# EAGLE board Main_PCB_Layout (EAGLE 9.7.0)
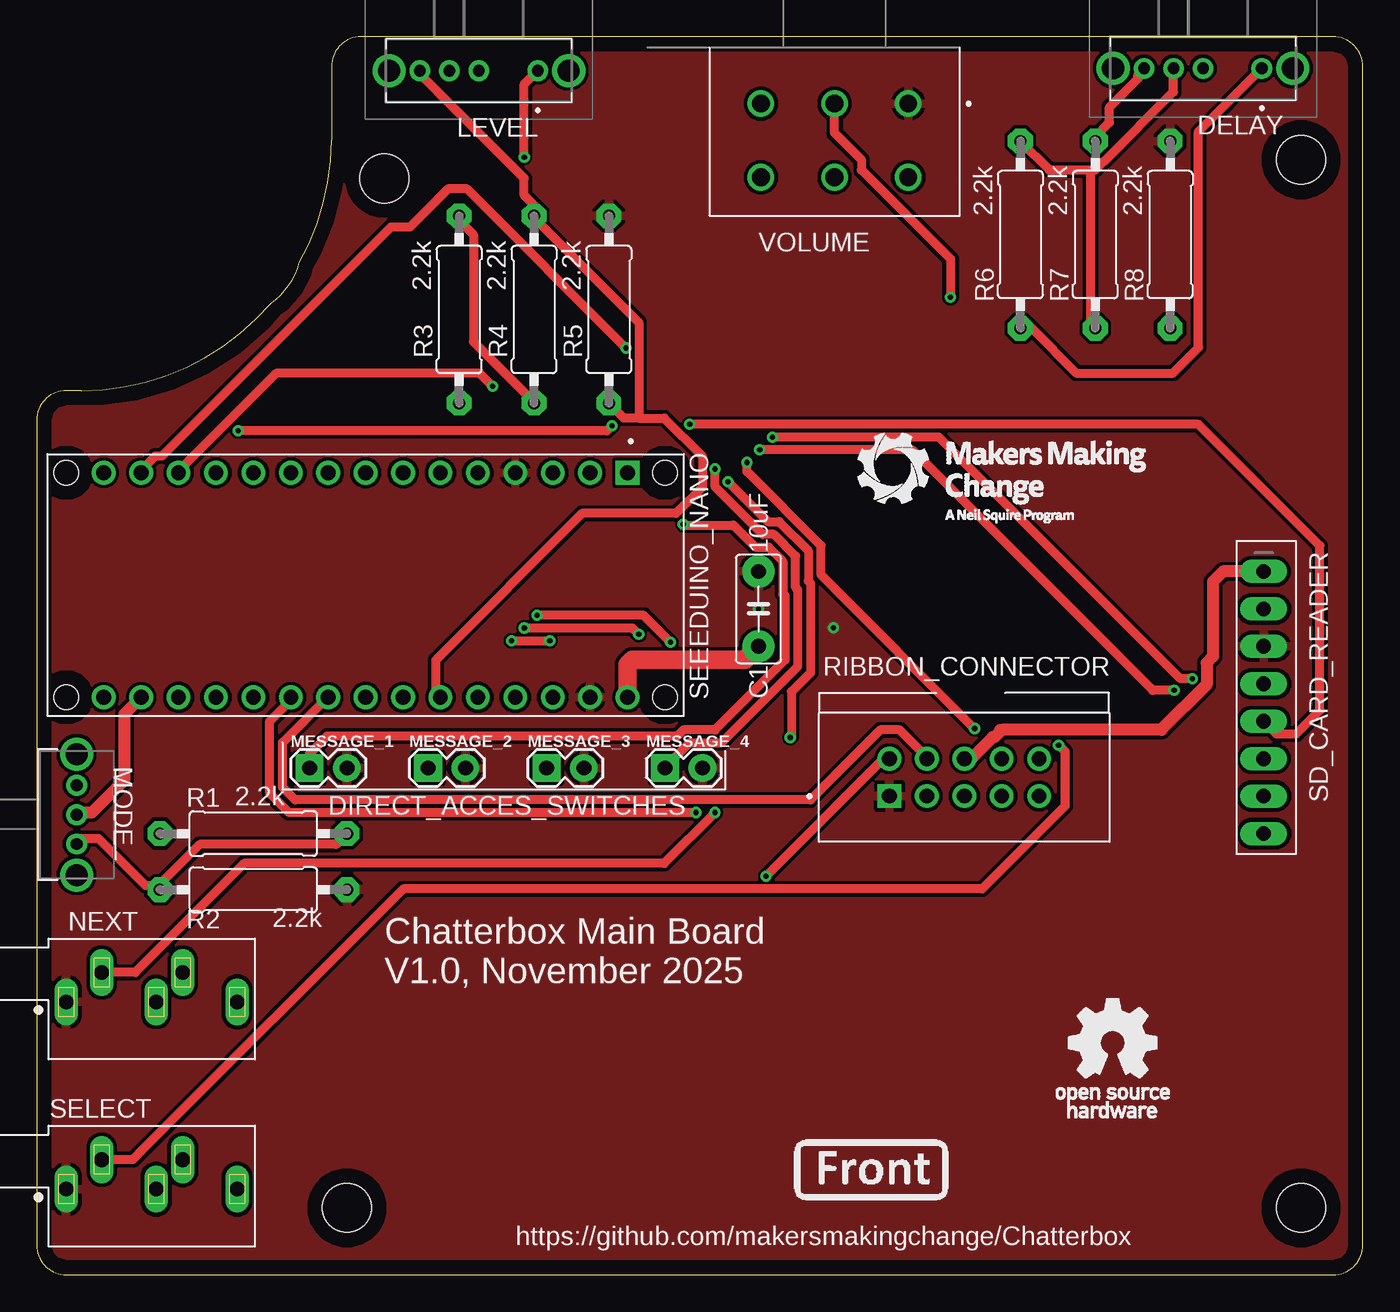
[diagram p0: board, top side]
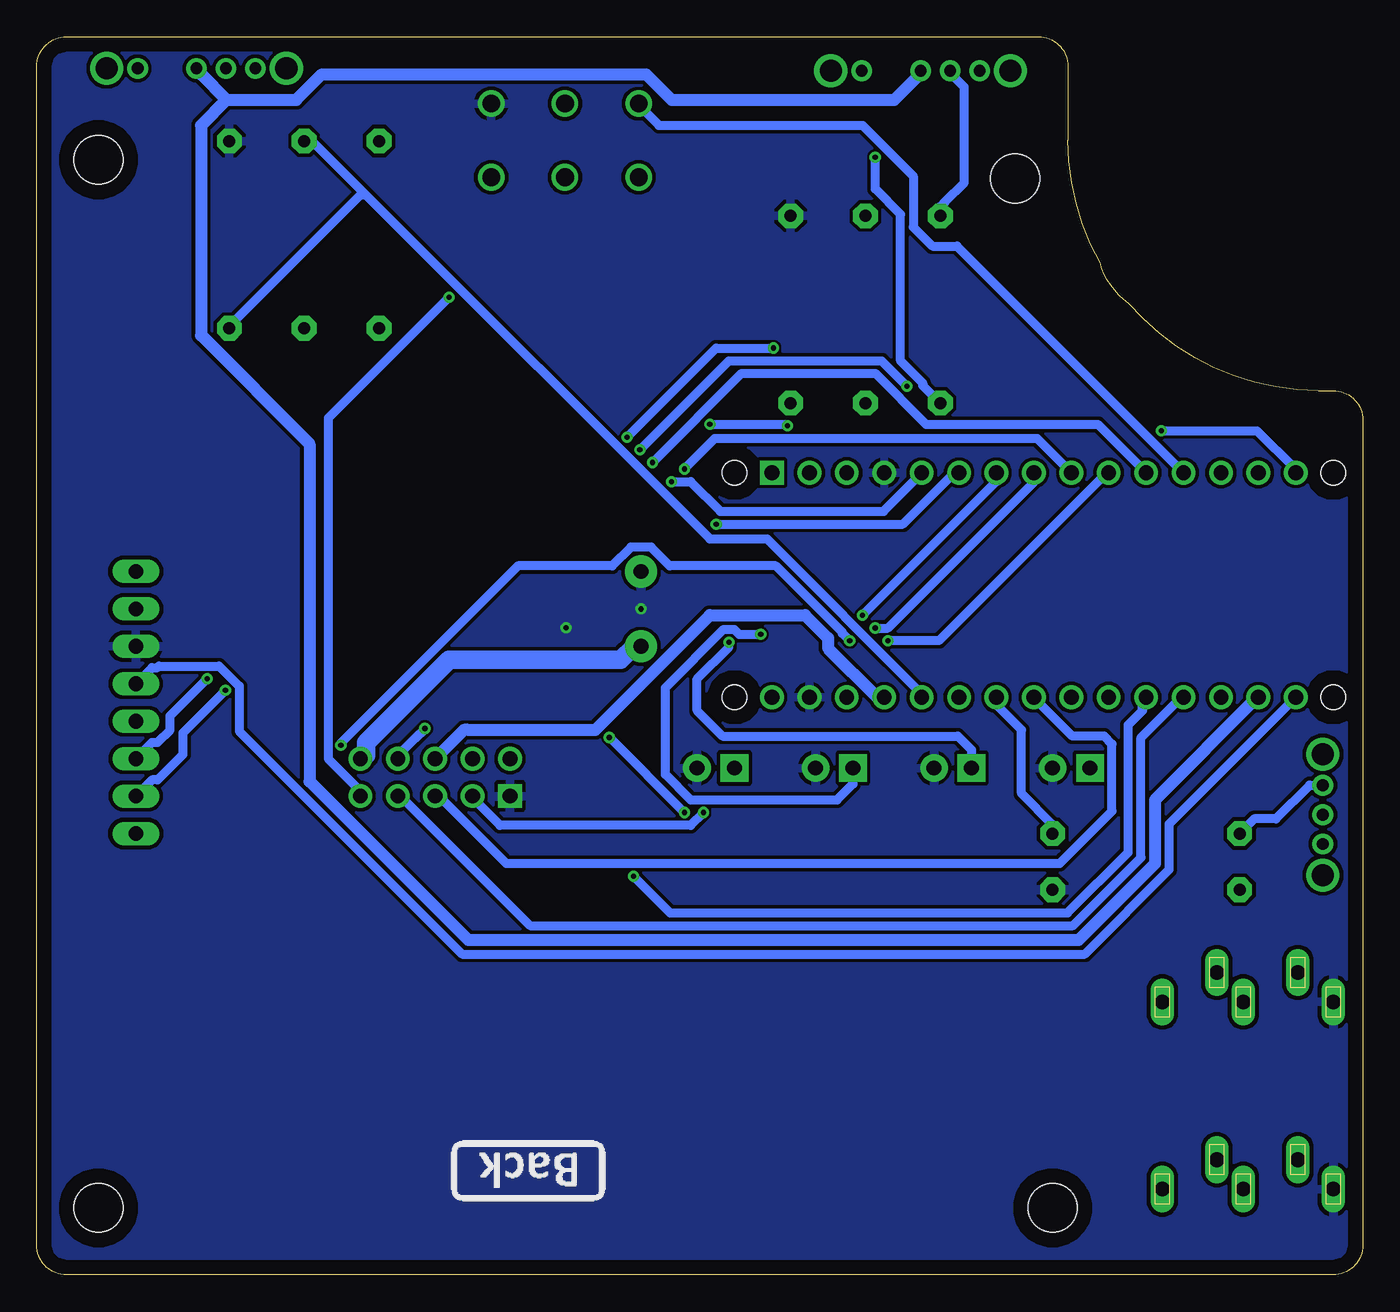
[diagram p1: board, bottom side, seen from below]

Size 90 x 84 mm. Coordinates in mm from the lower left corner, seen from the top.
Outline: 3,60 2,60 arc90 0,58 0,2 arc90 2,0 88,0 arc90 90,2 90,82 arc90 88,84 22,84 arc90 20,82 20,77 arc-29 17.82,68.67 arc-39 15.9,65.92 arc-49 3,60
Copper layers (1*16): Top / Bottom
Stack-up Default Layer Stack: Top SilkScreen Epoxy Ink / Top SolderMask SR:Green 0.0254mm Dk 4.3 / Top Surface Finish Lead-Free 0.02mm / Top CuFoil:007 0.035mm / Dielectric-1 User Defined 1.5mm / Bottom CuFoil:007 0.035mm / Bottom Surface Finish Lead-Free 0.02mm / Bottom SolderMask SR:Green 0.0254mm Dk 4.3 / Bottom SilkScreen Epoxy Ink
Design rules: minimum copper width 16mil, minimum drill size 0.35mm, copper clearance all to all 6mil, copper clearance wire_polygon to wire_polygon 10mil, copper clearance wire_polygon to pad_smd 10mil, copper clearance wire_polygon to via 6mil, copper clearance pad_smd to pad_smd 6mil, copper clearance pad_smd to via 6mil, copper clearance via to via 6mil, copper clearance smd to pad (same net) 6mil, copper clearance smd to via (same net) 6mil, copper clearance smd to smd (same net) 6mil, dimension clearance 40mil, via restrict clearance 0mil, restrict clearance 0mil, drill distance 6mil, keepout clearance 0mil

## Footprints (pad centres in the part's own frame; a part is rotated, then mirrored left to right if it is on the bottom)
CAP-050-030X075 = drill 1.016 pad 2.184: 1 -2.54,0; 2 2.54,0
OS103011MA7QP1 = drill 0.8 pad 1.3: 1 0,0; 2 4,0; 3 6,0; 4 8,0 | drill 1.5 pad 2.25: MH1 -2.1,0; MH2 10.1,0
HEADER_MALE-1X02 = drill 1.016 pad 1.88 square: 1 0,0 | drill 1.016 pad 1.88: 2 2.54,0
SWITCH_SPDT_11MA1QS1 = drill 0.813 pad 1.321: 1 -2.007,0; 2 0,0; 3 1.981,0 | drill 1.499 pad 2.007: 4 -4.115,0; 5 4.089,0
CUI_SJ1-3535NG = drill 1 long: 1 0,0; 2 2.4,2; 3 7.9,2; 4 11.6,0; 5 6.1,0
0309/12 = drill 0.813 pad 1.676 octagon: 1 -6.35,0; 2 6.35,0
AMPHENOL_86130101014345E1LF = drill 1 pad 1.508 square: 01 -5.08,-1.27 | drill 1 pad 1.508: 02 -5.08,1.27; 03 -2.54,-1.27; 04 -2.54,1.27; 05 0,-1.27; 06 0,1.27; 07 2.54,-1.27; 08 2.54,1.27; 09 5.08,-1.27; 10 5.08,1.27
1X08_OVAL = drill 1 long: 1 -8.89,0; 2 -6.35,0; 3 -3.81,0; 4 -1.27,0; 5 1.27,0; 6 3.81,0; 7 6.35,0; 8 8.89,0
MODULE_A000005 = drill 1 square: 1 -7.62,17.78 | drill 1: 2 -7.62,15.24; 3 -7.62,12.7; 4 -7.62,10.16; 5 -7.62,7.62; 6 -7.62,5.08; 7 -7.62,2.54; 8 -7.62,0; 9 -7.62,-2.54; 10 -7.62,-5.08; 11 -7.62,-7.62; 12 -7.62,-10.16; 13 -7.62,-12.7; 14 -7.62,-15.24; 15 -7.62,-17.78; 16 7.62,-17.78; 17 7.62,-15.24; 18 7.62,-12.7; 19 7.62,-10.16; 20 7.62,-7.62; 21 7.62,-5.08; 22 7.62,-2.54; 23 7.62,0; 24 7.62,2.54; 25 7.62,5.08; 26 7.62,7.62; 27 7.62,10.16; 28 7.62,12.7; 29 7.62,15.24; 30 7.62,17.78 | hole 1.651: -7.62,-20.32; 7.62,-20.32; -7.62,20.32; 7.62,20.32
STAND-OFF = hole 3.302: 0,0
POT_PTN16-A10125K1A2 = drill 1.2: R1_1 0,0; R1_2 5,0; R1_3 10,0; R2_1 0,5; R2_2 5,5; R2_3 10,5

## Placement (x,y rotation side)
C1  CAPACITOR-US-050-030X075  [CAP-050-030X075]  48.99,45.18 90 top
DELAY  OS103011MA7QP1  [OS103011MA7QP1]  83.16,81.86 180 top
LEVEL  OS103011MA7QP1  [OS103011MA7QP1]  34.01,81.7 180 top
MESSAGE_1  HEADER_MALE-1X02  [HEADER_MALE-1X02]  18.51,34.38 0 top
MESSAGE_2  HEADER_MALE-1X02  [HEADER_MALE-1X02]  26.55,34.38 0 top
MESSAGE_3  HEADER_MALE-1X02  [HEADER_MALE-1X02]  34.6,34.38 0 top
MESSAGE_4  HEADER_MALE-1X02  [HEADER_MALE-1X02]  42.64,34.38 0 top
MODE  SWITCH-SPDT-OS102011  [SWITCH_SPDT_11MA1QS1]  2.7,31.21 270 top
NEXT  CUI_SJ1-3535NGSJ1-3535NG  [CUI_SJ1-3535NG]  2,18.51 0 top
R1  2.2K  [0309/12]  14.7,29.94 0 top
R2  2.2K  [0309/12]  14.7,26.13 0 top
R3  2.2K  [0309/12]  28.67,65.5 90 top
R4  2.2K  [0309/12]  33.75,65.5 90 top
R5  2.2K  [0309/12]  38.83,65.5 90 top
R6  2.2K  [0309/12]  66.77,70.58 90 top
R7  2.2K  [0309/12]  71.85,70.58 90 top
R8  2.2K  [0309/12]  76.93,70.58 90 top
RIBBON_CONNECTOR  86130101014345E1LF  [AMPHENOL_86130101014345E1LF]  62.96,33.75 0 top
SD_CARD_READER  [1X08_OVAL]  83.28,38.83 270 top
SEEEDUINO_NANO  A000005  [MODULE_A000005]  22.32,46.8 270 top
SELECT  CUI_SJ1-3535NGSJ1-3535NG  [CUI_SJ1-3535NG]  2,5.81 0 top
U$1  MMC_LOGO-SM  [MMC_SMALL_LOGO]  66.77,54.07 0 top
U$2  OSHW_LOGO-SM  [OSHW_SMALL_LOGO]  73.12,14.7 0 top
U$3  MMC_LABEL-FRONT  [LABEL-FRONT]  56.61,7.08 0 top
U$4  STAND-OFF-  [STAND-OFF]  85.82,75.66 0 top
U$5  MMC_LABEL-BACK  [LABEL-BACK]  56.61,7.08 180 bottom
U$10  STAND-OFF-  [STAND-OFF]  23.59,74.39 0 top
U$11  STAND-OFF-  [STAND-OFF]  85.82,4.54 0 top
U$12  STAND-OFF-  [STAND-OFF]  21.05,4.54 0 top
VOLUME  PTN16-A10125K1A2  [POT_PTN16-A10125K1A2]  59.15,79.47 180 top

## Library data of the parts
C1 MESSAGE_1-MESSAGE_4 = MMC_Electronics_Library
DELAY LEVEL = OS103011MA7QP1; ARROW_PART_NUMBER: OS103011MA7QP1; ARROW_PRICE-STOCK: https://www.arrow.com/en/products/os103011ma7qp1/ck?region=europe; DESCRIPTION: Switch Slide ON ON ON SP3T Side Slide 0.1A 12VDC 10000Cycles PC Pins Bracket Mount/Through Hole Bulk; HEIGHT: 4.7mm; MANUFACTURER_NAME: C & K COMPONENTS; MANUFACTURER_PART_NUMBER: OS103011MA7QP1; MOUSER_PART_NUMBER: 611-OS103011MA7QP1; MOUSER_PRICE-STOCK: https://www.mouser.co.uk/ProductDetail/CK/OS103011MA7QP1?qs=WtljUlYws5SZzmleoPXX2w%3D%3D
MODE NEXT SD_CARD_READER SELECT U$1-U$5 U$10-U$12 = MMC_Eagle
R1-R8 = adafruit
RIBBON_CONNECTOR = 86130101014345E1LF; MANUFACTURER: Amphenol; PARTREV: C; STANDARD: Manufacturer Recommendations
SEEEDUINO_NANO = A000005; MANUFACTURER: Arduino; MAXIMUM_PACKAGE_HEIGHT: N/A; PARTREV: 23/03/2020; STANDARD: Manufacturer Recommendations
VOLUME = PTN16-A10125K1A2; MANUFACTURER: CUI Devices; MAXIMUM_PACKAGE_HEIGHT: 21.5mm; PARTREV: 1.0; STANDARD: Manufacturer Recommendations

## Nets
+3.3V: DELAY.2 LEVEL.2 MODE.2 SEEEDUINO_NANO.17
+5V: RIBBON_CONNECTOR.06 SD_CARD_READER.1 SEEEDUINO_NANO.27
+9V: C1.1 RIBBON_CONNECTOR.10 SEEEDUINO_NANO.30
CLK: SD_CARD_READER.4 SEEEDUINO_NANO.16
CS: SD_CARD_READER.7 SEEEDUINO_NANO.13
DELAY: DELAY.4 R7.2 R8.1 SEEEDUINO_NANO.26
DI: SD_CARD_READER.6 SEEEDUINO_NANO.14
DO: SD_CARD_READER.5 SEEEDUINO_NANO.15
GND1: C1.2 MESSAGE_1.2 MESSAGE_2.2 MESSAGE_3.2 MESSAGE_4.2 NEXT.1 R2.2 R5.2 R8.2 RIBBON_CONNECTOR.01 SD_CARD_READER.3 SEEEDUINO_NANO.4 SEEEDUINO_NANO.29 SELECT.1 VOLUME.R1_1
LED1: RIBBON_CONNECTOR.02 SEEEDUINO_NANO.20
LED2: RIBBON_CONNECTOR.03 SEEEDUINO_NANO.21
LED3: RIBBON_CONNECTOR.04 SEEEDUINO_NANO.22
LED4: RIBBON_CONNECTOR.05 SEEEDUINO_NANO.23
LVL: LEVEL.4 R4.2 R5.1 SEEEDUINO_NANO.25
MIC: RIBBON_CONNECTOR.07 SEEEDUINO_NANO.19
MODE: MODE.3 R1.2 R2.1 SEEEDUINO_NANO.24
MSG1: MESSAGE_1.1 SEEEDUINO_NANO.6
MSG2: MESSAGE_2.1 SEEEDUINO_NANO.7
MSG3: MESSAGE_3.1 SEEEDUINO_NANO.8
MSG4: MESSAGE_4.1 SEEEDUINO_NANO.9
N$22: MODE.1 R1.1
N$24: LEVEL.1 R3.1
N$25: LEVEL.3 R3.2 R4.1
N$27: DELAY.1 R6.1
N$30: DELAY.3 R6.2 R7.1
NEXT: NEXT.2 SEEEDUINO_NANO.5
POT: SEEEDUINO_NANO.12 VOLUME.R1_3
SEL: SEEEDUINO_NANO.10 SELECT.2
SPK_SHT: RIBBON_CONNECTOR.08 SEEEDUINO_NANO.11
VOL: RIBBON_CONNECTOR.09 VOLUME.R1_2

## Tracks (layer width: path | path; a pad name or v marks a point on that pad's centre or on a via)
+3.3V
  Top 0.813: MODE.2 2.86,31.36 3.73,31.36 5.96,33.6 5.96,38.06 SEEEDUINO_NANO.17
  Bottom 0.813: 77.13,79.72 72.38,79.72 70.66,81.45 48.63,81.45 46.91,79.72 31.79,79.72 30.07,81.45 LEVEL.2 | 77.13,79.72 78.86,81.45 DELAY.2 | 77.13,79.72 78.86,78 78.86,63.75 71.48,56.37 71.48,33.48 60.73,22.73 19.27,22.73 14.09,27.91 14.09,32.23 7.14,39.18 SEEEDUINO_NANO.17
+5V
  Top 0.813: 65.5,36.98 76.34,36.98 79.41,40.04 79.41,41.52 79.84,41.96 79.84,47.04 80.53,47.72 SD_CARD_READER.1 | 65.38,36.98 65.5,36.98 | RIBBON_CONNECTOR.06 63.43,35.02 64.89,36.48 65.01,36.48 65.5,36.98
  Bottom 0.813: SEEEDUINO_NANO.27 32.95,39.18 36.29,42.52 36.29,43.2 37.84,44.75 44.31,44.75 52.09,36.98 60.42,36.98 60.73,36.98 61,36.98 RIBBON_CONNECTOR.06
+9V
  Top 1.27: SEEEDUINO_NANO.30 40.1,41.4 40.43,41.73 48.08,41.73 C1.1
  Bottom 1.27: RIBBON_CONNECTOR.10 67.63,35.25 67.63,36.11 62.02,41.73 50.36,41.73 49.5,42.59 48.99,42.59 C1.1
CLK
  Bottom 0.61: SEEEDUINO_NANO.16 13.12,30.59 13.12,27.51 18.87,21.76 61.12,21.76 76.26,36.9 76.26,39.94 77.63,41.31 81.7,41.31 81.8,41.2 82.18,41.2 SD_CARD_READER.4
CS  (via drill 0.35)
  Top 0.61: v30.93,60.29 30.07,61.16 16.25,61.16 9.77,54.68 SEEEDUINO_NANO.13 | v49.07,55.98 59.43,55.98 75.75,39.65 v77.2,39.65
  Bottom 0.61: v30.93,60.29 32.66,62.02 43.02,62.02 v49.07,55.98 | SD_CARD_READER.7 82.18,33.58 81.8,33.58 80.1,35.29 80.1,36.75 v77.2,39.65
DELAY
  Top 0.61: DELAY.4 74.75,81.44 74.75,81.16 72.81,79.23 72.81,78.2 71.85,77.23 R7.2
  Bottom 0.61: 67.63,73.25 71.52,77.13 R7.2 | 67.63,73.25 44.32,49.93 40.43,49.93 29.94,39.44 SEEEDUINO_NANO.26 | 67.63,73.25 68.06,73.25 76.7,64.61 R8.1
DI  (via drill 0.35)
  Top 0.61: v40,62.88 29.2,73.68 27.91,73.68 25.32,71.09 24.02,71.09 8.48,55.54 8.04,55.54 7.18,54.68 SEEEDUINO_NANO.14 | v78.44,40.44 77.63,40.44 61.23,56.84 v49.93,56.84
  Bottom 0.61: v40,62.88 43.88,62.88 v49.93,56.84 | v78.44,40.44 80.96,37.93 80.96,36.96 81.8,36.12 82.18,36.12 SD_CARD_READER.6
DO  (via drill 0.35)
  Top 0.61: v13.66,57.27 38.7,57.27 v39.04,57.61 | v44.32,57.7 78.86,57.7 87.09,49.47 87.09,38.3 85.47,36.68 84.55,36.68 84.16,36.68 SD_CARD_READER.5
  Bottom 0.61: v13.66,57.27 7.18,57.27 4.59,54.68 SEEEDUINO_NANO.15 | v44.32,57.7 39.13,57.7 v39.04,57.61
GND1  (via drill 0.35)
  other vias: 54.07,43.91 48.99,45.18
  pour Top: -1.81,-3.08 -1.81,89.63 88.36,89.63 94.71,83.28 94.71,-1.81 92.17,-4.35 -0.54,-4.35
  pour Bottom: -1.81,88.36 90.9,88.36 92.17,87.09 92.17,0.73 87.09,-4.35 -4.35,-4.35 -5.62,-3.08 -5.62,84.55
LED1  (via drill 0.35)
  Top 0.61: v49.5,27.04 57.04,34.59 57.47,35.02 RIBBON_CONNECTOR.02
  Bottom 0.61: SEEEDUINO_NANO.20 14.95,39.13 14.95,38.27 15.92,37.31 15.92,28.67 20.03,24.55 47.01,24.55 v49.5,27.04
LED2  (via drill 0.35)
  Top 0.61: v44.75,31.36 17.11,31.36 15.82,32.66 15.82,37.56 17.24,38.98 SEEEDUINO_NANO.21
  Bottom 0.61: v44.75,31.36 45.61,30.5 58.57,30.5 60.42,32.35 RIBBON_CONNECTOR.03
LED3
  Top 0.61: RIBBON_CONNECTOR.04 60.42,35.12 58.57,36.98 57.27,36.98 52.52,32.23 17.55,32.23 16.68,33.09 16.68,36.11 19.75,39.18 SEEEDUINO_NANO.22
LED4
  Bottom 0.61: RIBBON_CONNECTOR.05 62.71,32.48 58.13,27.91 20.57,27.91 17.01,31.46 17.01,36.01 17.55,36.54 19.7,36.54 22.32,39.16 SEEEDUINO_NANO.23
LVL
  Top 0.61: 40.86,58.13 42.59,58.13 45.18,55.54 45.18,53.45 43.38,51.66 37.03,51.66 27.07,41.7 27.07,39.51 SEEEDUINO_NANO.25 | 40.86,58.13 40.86,64.61 33.75,71.72 R4.2 33.75,72.59 33.09,73.25 33.09,74.39 26.01,81.47 LEVEL.4 | 40.86,58.13 39.85,58.13 R5.1
MIC
  Bottom 0.61: SEEEDUINO_NANO.19 12.36,39.13 15.06,36.44 15.06,28.31 19.67,23.69 56.51,23.69 65.3,32.48 RIBBON_CONNECTOR.07
MODE
  Top 0.61: MODE.3 3.07,29.6 4.2,29.6 7.37,26.42 8.06,26.42 R2.1 8.35,26.49 11.07,29.2 20.31,29.2 R1.2
  Bottom 0.61: SEEEDUINO_NANO.24 24.89,39.13 24.89,38.7 23.16,36.98 23.16,32.66 21.05,30.55 R1.2
MSG1  (via drill 0.35)
  Top 0.61: v43.88,50.94 43.96,50.86 47.27,50.86 48.77,49.37 49.67,49.37 50.64,48.4 50.64,46.2 50.79,46.04 50.79,41.73 46.04,36.98 43.88,36.98 43.45,36.54 19.7,36.54 18.51,35.35 MESSAGE_1.1
  Bottom 0.61: v43.88,50.94 31.21,50.94 27.73,54.42 SEEEDUINO_NANO.6
MSG2  (via drill 0.35)
  Top 0.61: v43.02,42.92 41.2,44.75 v33.95,44.75
  Bottom 0.61: v43.02,42.92 43.02,42.59 45.18,40.43 45.18,38.27 43.45,36.54 27.48,36.54 26.55,35.62 MESSAGE_2.1 | v33.95,44.75 24.86,53.84 SEEEDUINO_NANO.7
MSG3  (via drill 0.35)
  Top 0.61: v33.09,43.88 40.43,43.88 v40.86,43.45
  Bottom 0.61: v33.09,43.88 32.23,43.88 22.32,53.79 SEEEDUINO_NANO.8 | v40.86,43.45 42.33,43.45 42.66,43.79 43.38,43.79 47.34,39.83 47.34,33.95 45.61,32.23 35.68,32.23 34.6,33.31 MESSAGE_3.1
MSG4  (via drill 0.35)
  Top 0.61: v46.04,54.68 46.04,53.46 49.27,50.23 50.03,50.23 51.51,48.76 51.51,46.63 51.66,46.48 51.66,41.29 46.48,36.11 44.32,36.11 42.64,34.44 MESSAGE_4.1
  Bottom 0.61: v46.04,54.68 43.98,56.75 22.11,56.75 SEEEDUINO_NANO.9
N$22
  Bottom 0.61: MODE.1 3.6,33.22 5.89,30.93 7.36,30.93 R1.1
N$24  (via drill 0.35)
  Top 0.61: v33.09,75.84 33.09,80.79 LEVEL.1
  Bottom 0.61: v33.09,75.84 33.09,73.68 31.36,71.95 31.36,62.02 29.85,60.51 29.85,60.33 R3.1
N$25
  Top 0.61: R4.1 33.52,59.43 29.64,63.32 29.64,70.58 28.67,71.55 R3.2
  Bottom 0.61: LEVEL.3 27.91,81.45 27.04,80.59 27.04,74.11 28.35,72.8 28.67,72.48 R3.2
N$27
  Top 0.61: DELAY.1 78.86,77.56 78.86,62.91 77.13,61.18 70.58,61.18 67.53,64.23 R6.1
N$30
  Top 0.61: 71.52,74.97 69.31,74.97 68.93,74.97 68.73,74.97 R6.2 | 71.52,74.97 71.85,74.97 72.41,75.53 72.43,75.53 77.16,80.27 DELAY.3 | 71.52,74.97 71.52,64.61 R7.1
NEXT  (via drill 0.35)
  Top 0.61: v46.04,31.36 42.59,27.91 14.09,27.91 6.69,20.51 NEXT.2 | v51.14,36.46 51.23,36.54 51.23,39.57 52.52,40.86 52.52,46.91 52.37,47.06 52.37,49.12 50.39,51.1 49.62,51.1 v46.91,53.82
  Bottom 0.61: v46.91,53.82 45.61,53.82 43.6,51.8 32.52,51.8 29.94,54.38 SEEEDUINO_NANO.5 | v51.14,36.46 v46.04,31.36
POT
  Bottom 0.61: SEEEDUINO_NANO.12 27.53,69.79 29.2,69.79 30.5,71.09 30.5,74.54 33.95,78 47.77,78 49.15,79.38 VOLUME.R1_3
SEL  (via drill 0.35)
  Top 0.61: v32.23,43.02 v34.82,43.02 | v69.36,35.94 69.79,35.51 69.79,31.79 64.18,26.18 24.89,26.18 7.07,8.36 6.75,8.04 6.51,7.81 SELECT.2
  Bottom 0.61: v32.23,43.02 28.77,43.02 17.55,54.25 SEEEDUINO_NANO.10 | v69.36,35.94 69.36,36.07 57.33,48.1 50.94,48.1 49.67,49.37 48.31,49.37 47.04,48.1 39.83,48.1 35.33,43.6 35.33,43.53 v34.82,43.02
SPK_SHT  (via drill 0.35)
  Top 0.61: v63.66,37.06 53.23,47.49 53.23,49.48 48.2,54.51 v48.2,55.11
  Bottom 0.61: v48.2,55.11 42.16,61.16 33.09,61.16 29.64,57.7 17.98,57.7 SEEEDUINO_NANO.11 | v63.66,37.06 64.33,36.39 65.5,35.22 RIBBON_CONNECTOR.08
VOL  (via drill 0.35)
  Top 0.61: v62.02,66.34 62.02,68.93 55.98,74.97 55.98,75.66 54.15,77.48 VOLUME.R1_2
  Bottom 0.61: v62.02,66.34 70.22,58.13 70.22,35.02 68.04,32.84 RIBBON_CONNECTOR.09

## Text on the board
SilkscreenTop: 2.2k | 2.2k | 2.2k | 2.2k | 2.2k | 2.2k | 10uF | 2.2k | DIRECT_ACCES_SWITCHES | 2.2k | Chatterbox Main Board / V1.0, November 2025 | https://github.com/makersmakingchange/Chatterbox